# Altium PCB motherboard.PcbDoc (part 1 of 2)
Units mm, origin at the board's own origin, x right, y up, seen from the top; angles counter-clockwise.
Board outline 30 x 30 mm, 4 copper layers (Top Layer, Layer 1, Layer 2, Bottom Layer), stack 0.603 mm thick; 93 components, 78 nets, 485 pads, 216 vias.
Unrouted connection lines stored in the file: 1.
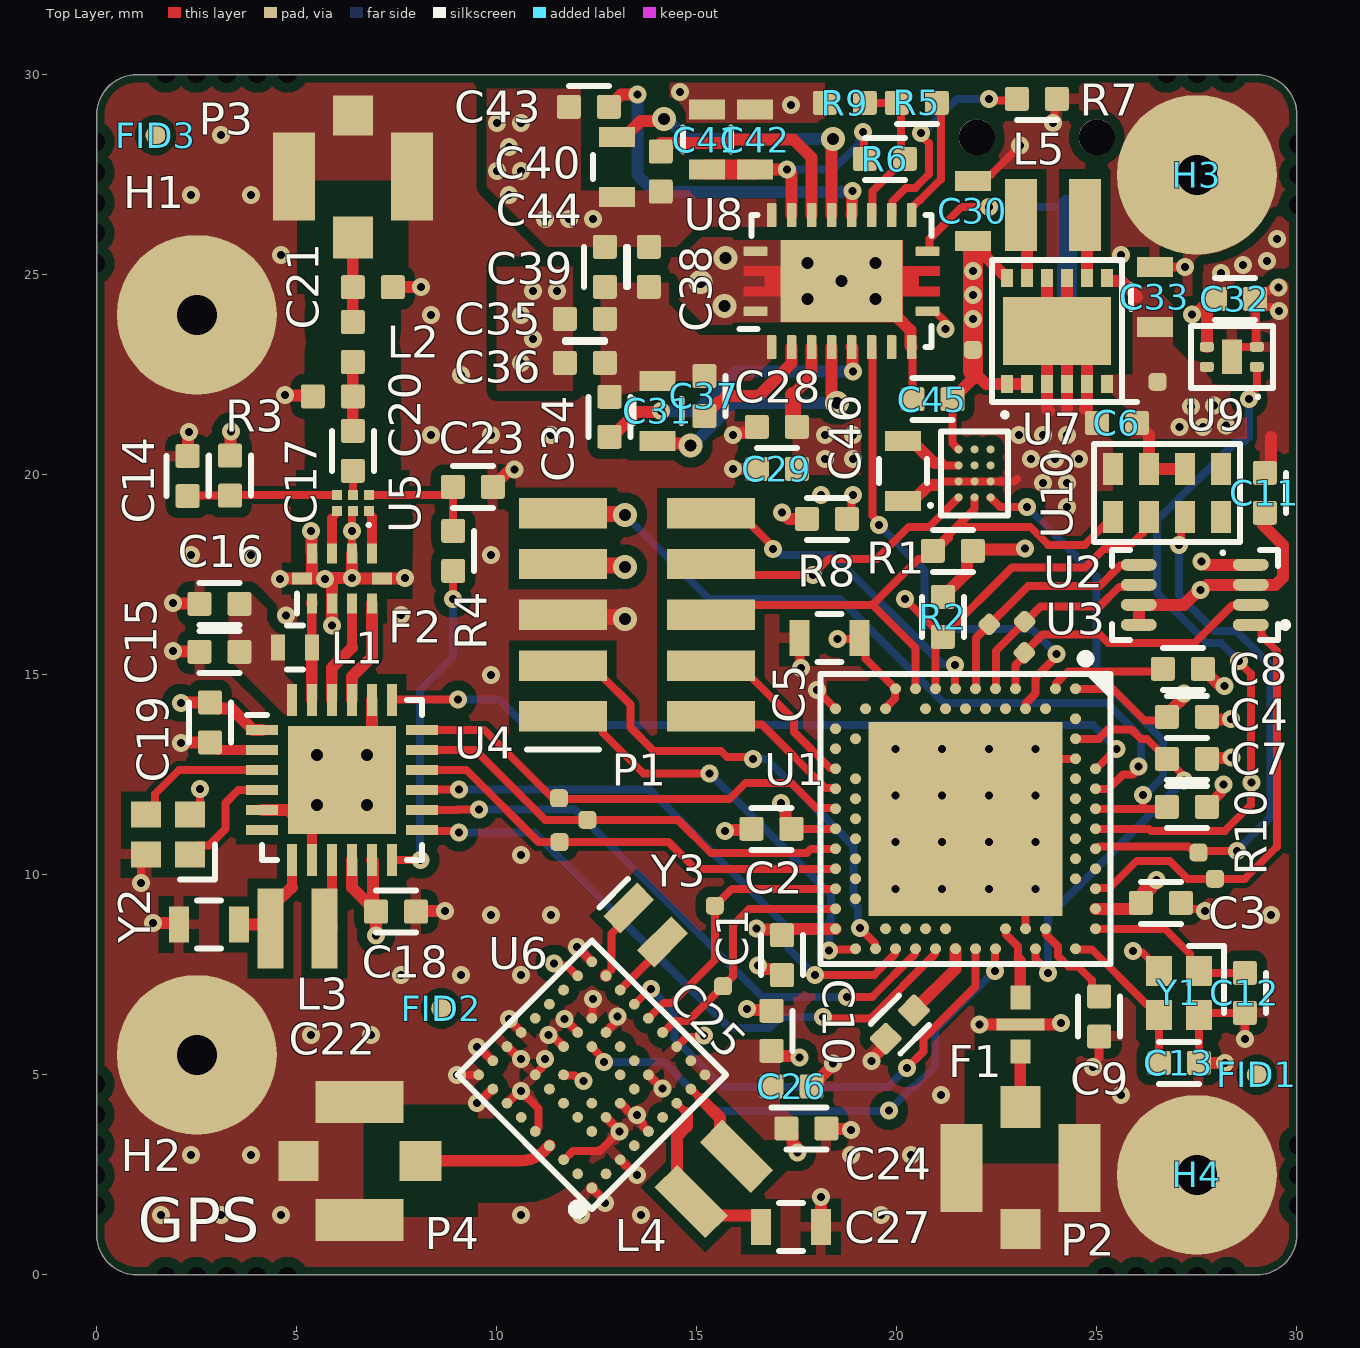
[diagram p0: Top Layer view]
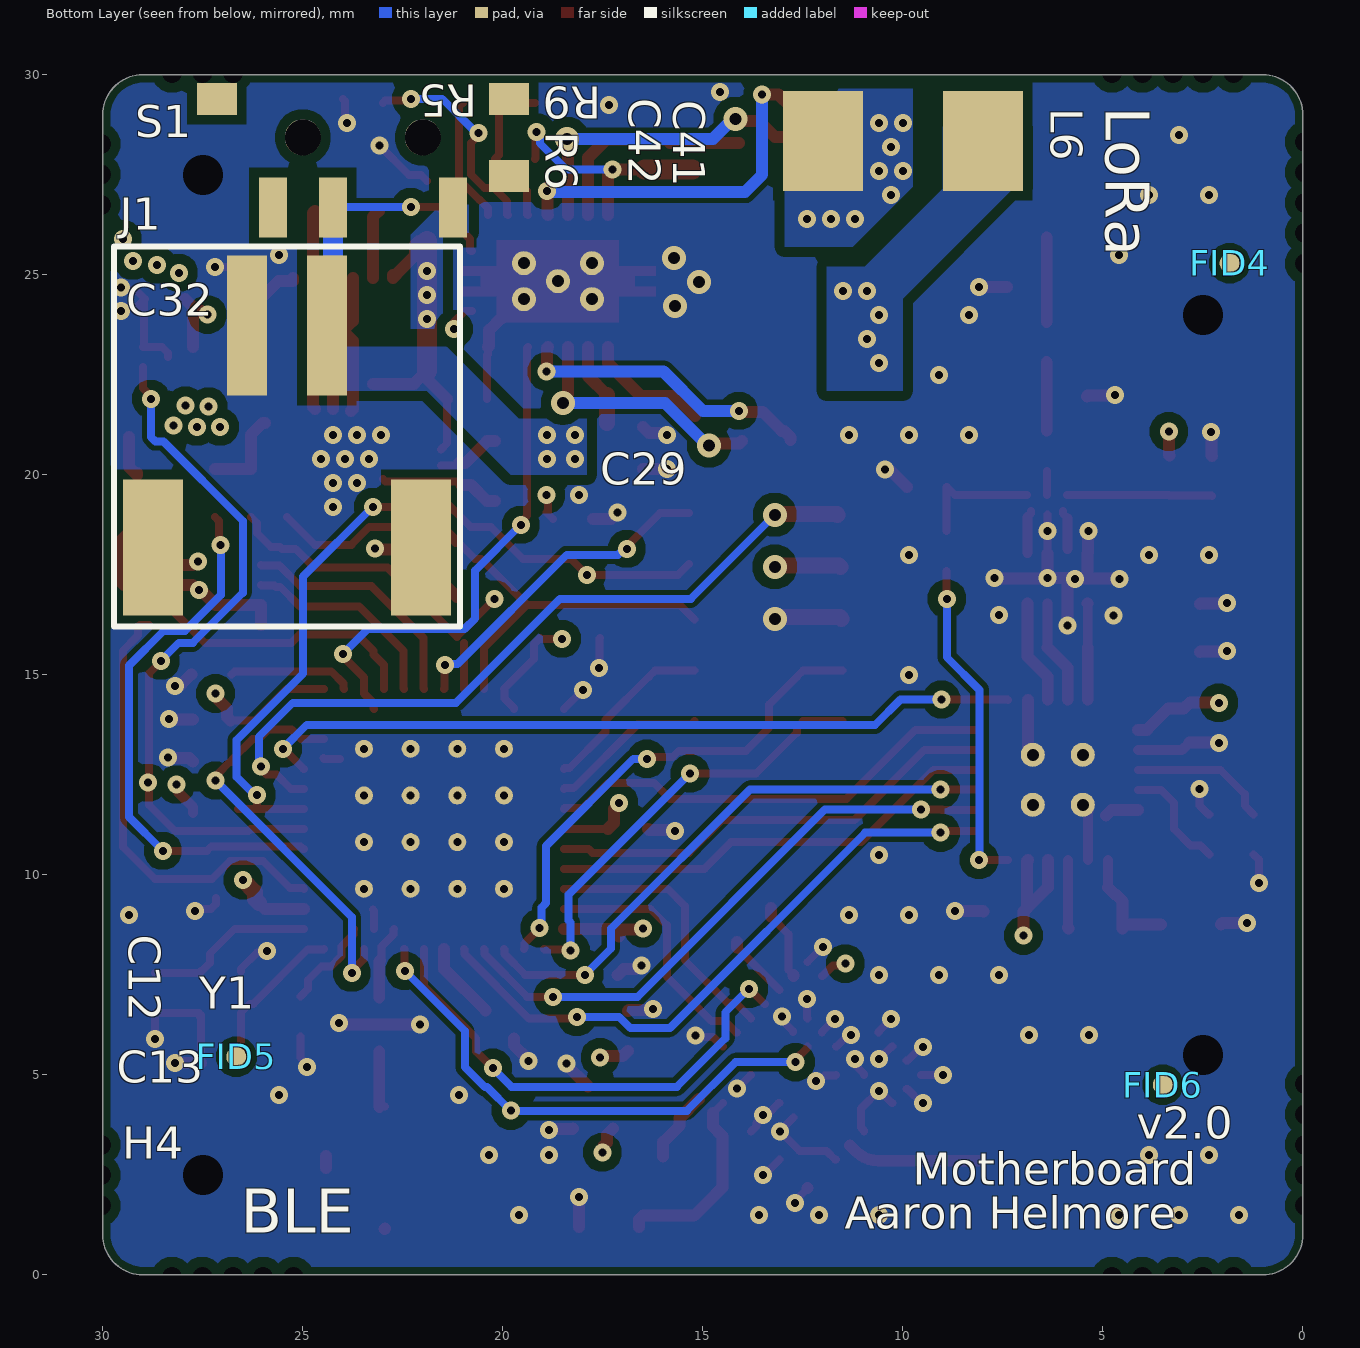
[diagram p1: Bottom Layer view, seen from below]
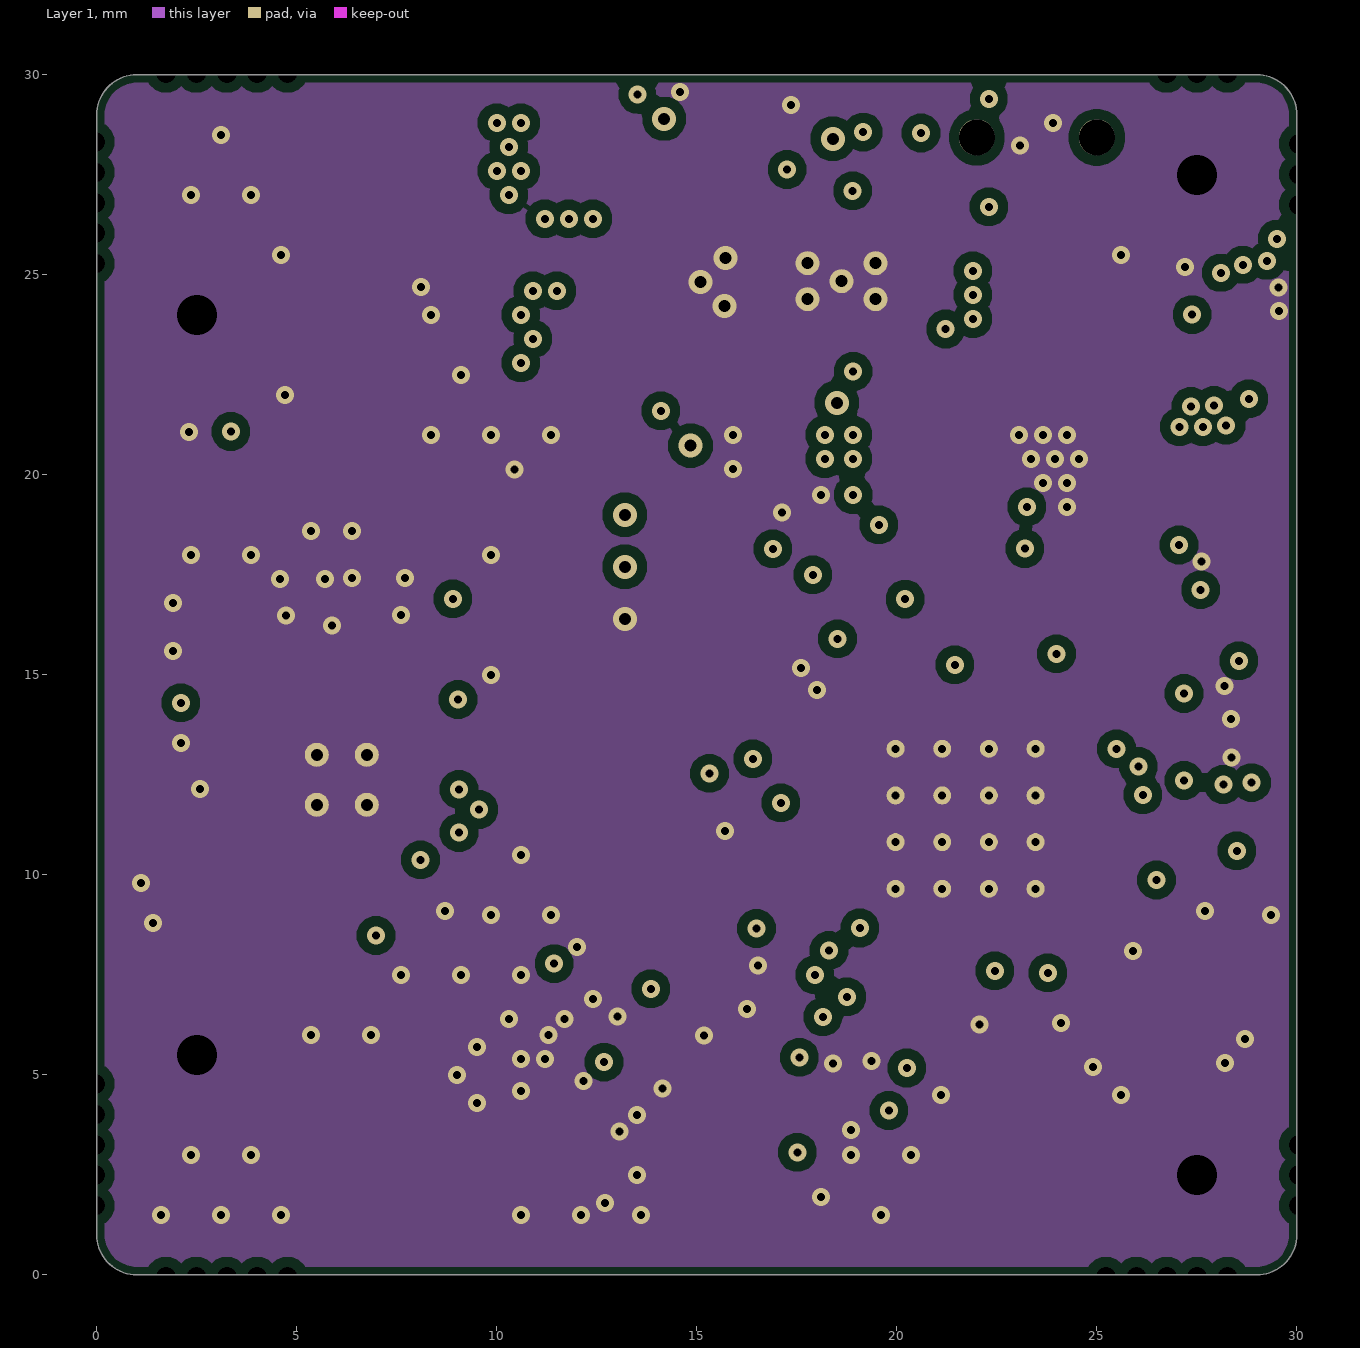
[diagram p2: Layer 1]
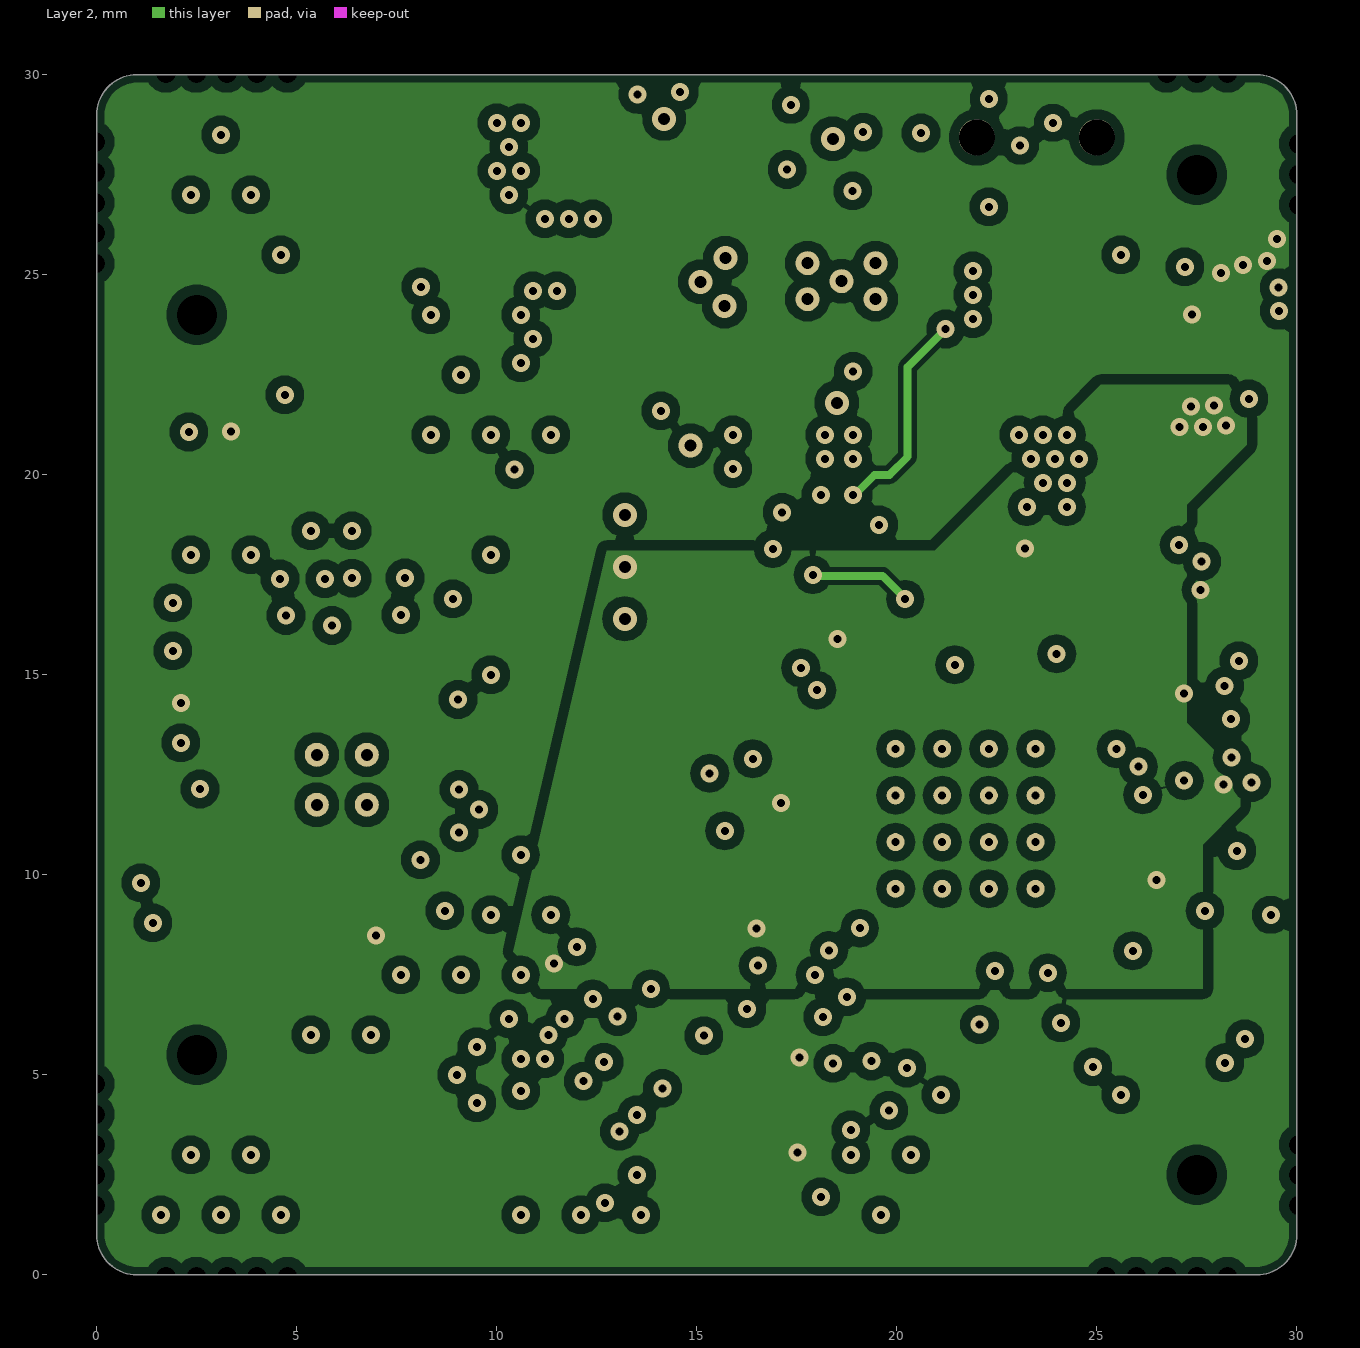
[diagram p3: Layer 2]

## Layer stack, top to bottom
Top Solder: solder mask 0.0102, Solder Resist, Dk 3.5
Top Layer: signal copper 0.0356
Dielectric 2: prepreg 0.0711, PP-006, Dk 4.1
Layer 1: signal copper 0.035
Dielectric 1: dielectric 0.32, FR-4, Dk 4.8
Layer 2: signal copper 0.035
Dielectric 3: prepreg 0.0711, PP-006, Dk 4.1
Bottom Layer: signal copper 0.0356
Bottom Solder: solder mask 0.0102, Solder Resist, Dk 3.5

## Board outline
0,1 0,29 cw(c1,29) 1,30 29,30 cw(c29,29) 30,29 30,1 cw(c29,1) 29,0 1,0 cw(c1,1)

## Design rules (kind name [scope] priority, off if disabled: settings)
BoardOutlineClearance Board_MouseBite_Clearance [IsFree and IsThruPin] p1: gap=0 ignorepadtopadclearanceinfootprint=FALSE
BoardOutlineClearance [All] p2: gap=0.2 ignorepadtopadclearanceinfootprint=FALSE
Clearance ClearanceRFLines [InNetClass('NRF_RF_LINES') or InNetClass('SX_RF_LINES') or InNetClass('ZOE_RF_LINES') vs InPolygon] p1: gap=0.9 ignorepadtopadclearanceinfootprint=TRUE
Clearance ClearanceNRF52 [InComponent('U1') and IsThruPin vs IsTrack] p2: gap=0.254 ignorepadtopadclearanceinfootprint=TRUE except(0: Arc-Hole Track-Hole SMDPad-Hole THPad-Hole Via-Hole Fill-Hole Poly-Hole Region-Hole Text-Hole; 0.1: Arc-Arc Arc-Track Track-Track; 0.127: Arc-Fill Arc-Poly Arc-Region Track-Fill Track-Poly Track-Region SMDPad-SMDPad; 0.15: Arc-Text Track-Text SMDPad-Text THPad-Text Via-Text Fill-Text Poly-Text Region-Text Text-Text; 0.154: Arc-THPad Arc-Via Track-THPad Track-Via SMDPad-Via; 0.2: Arc-SMDPad Track-SMDPad; 0.5: THPad-THPad)
Clearance [InComponent('U5') vs IsTrack] p3: gap=0.254 ignorepadtopadclearanceinfootprint=FALSE except(0: Arc-Hole Track-Hole SMDPad-Hole THPad-Hole Via-Hole Fill-Fill Fill-Poly Fill-Region Fill-Hole Poly-Poly Poly-Region Poly-Hole Region-Region Region-Hole Text-Hole; 0.1: Arc-Arc Arc-Track Arc-SMDPad Track-Track Track-SMDPad; 0.127: Arc-Fill Arc-Poly Arc-Region Track-Fill Track-Poly Track-Region SMDPad-SMDPad; 0.15: Arc-Text Track-Text SMDPad-Text THPad-Text Via-Text Fill-Text Poly-Text Region-Text Text-Text; 0.33: Arc-THPad Track-THPad; 0.5: THPad-THPad)
Clearance ClearanceViaToViaSameNet [IsVia vs IsVia] p4: gap=0.254 ignorepadtopadclearanceinfootprint=FALSE except(0.06: Via-Via)
Clearance ClearanceViaToPadSameNet [IsVia vs IsPad] p5: gap=0.075 ignorepadtopadclearanceinfootprint=TRUE
Clearance ClearanceDifferentNet [All] p6: gap=0.254 ignorepadtopadclearanceinfootprint=TRUE except(0: Arc-Hole Track-Hole SMDPad-Hole THPad-Hole Via-Hole Fill-Hole Poly-Hole Region-Hole Text-Hole; 0.1: Arc-Arc Arc-Track Track-Track; 0.127: Arc-Fill Arc-Poly Arc-Region Track-Fill Track-Poly Track-Region SMDPad-SMDPad; 0.15: Arc-Text Track-Text SMDPad-Text THPad-Text Via-Text Fill-Text Poly-Text Region-Text Text-Text; 0.154: Arc-Via Track-Via SMDPad-Via; 0.2: Arc-SMDPad Track-SMDPad; 0.33: Arc-THPad Track-THPad; 0.5: THPad-THPad)
HoleSize [All] p1: absolutevalues=TRUE maxlimit=6.3 minlimit=0.2 maxpercent=80.000 minpercent=20.000
MaxMinImpedance "Schematic Impedance Constraint_2" [InNetClass('ZOE_RF_LINES')] p1: minimum=49.50 maximum=50.50
MaxMinImpedance "Schematic Impedance Constraint_1" [InNetClass('SX_RF_LINES')] p2: minimum=49.50 maximum=50.50
MaxMinImpedance "Schematic Impedance Constraint" [InNetClass('NRF_RF_LINES')] p3: minimum=49.50 maximum=50.50
MinimumAnnularRing [All] p1: minimumring=0.1
MinimumSolderMaskSliver [All] p1: minsoldermaskwidth=0.05
PasteMaskExpansion [All] p1: expansion=0 percent=-10.000000
PlaneClearance [All] p1: clearance=0.3
PlaneConnect [All] p1: planeconnectstyle=Direct reliefexpansion=0.508 reliefentries=4 reliefconductorwidth=0.254 reliefairgap=0.254
PolygonConnect TopFloodSpedific [InComponentClass('largeItems') vs IsNamedPolygon('GND_TOP_FLOOD')] p1: connectstyle=Direct reliefconductorwidth=0.254 reliefentries=4 polygonreliefangle="90 Angle" airgapwidth=0.254
PolygonConnect TopFlood [All vs IsNamedPolygon('GND_TOP_FLOOD')] p2: thpad.connectstyle=Relief thpad.reliefconductorwidth=0.254 thpad.reliefentries=4 thpad.polygonreliefangle="90 Angle" thpad.airgapwidth=0.254 smdpad.connectstyle=Relief smdpad.reliefconductorwidth=0.254 smdpad.reliefentries=4 smdpad.polygonreliefangle="90 Angle" smdpad.airgapwidth=0.254 via.connectstyle=Direct via.reliefconductorwidth=0.254 via.reliefentries=4 via.polygonreliefangle="90 Angle" via.airgapwidth=0.254
PolygonConnect [All] p3: connectstyle=Direct reliefconductorwidth=0.254 reliefentries=4 polygonreliefangle="90 Angle" airgapwidth=0.254
RoutingLayers [All] p1: top layer_v5=TRUE mid layer 1_v5=FALSE mid layer 2_v5=TRUE bottom layer_v5=TRUE
RoutingVias [All] p1: holewidth=0.3 width=0.6 viastyle="Through Hole" minholewidth=0.2 minwidth=0.45 maxholewidth=0.711 maxwidth=1.27
SMDToPlane [All] p1: distance=100000
SilkToSilkClearance [All] p1: silktosilkclearance=0.15
SilkToSolderMaskClearance [IsPad] p1: minsilkscreentomaskgap=0.15 clearancetoexposedcopper=TRUE
SolderMaskExpansion [All] p1: expansion=0.05 istentingtop=TRUE
UnRoutedNet [All] p1: checkbadconnections=TRUE
Width [All] p1: maxlimit=0.6 minlimit=0.15 preferedwidth=0.2 minimp=50.000000 maximp=50.000000 favimp=50.000000
21 further rules are at their usual default settings.

## Classes and differential pairs
component class largeItems: H1 H2 H3 H4 P1 P2 P3 P4
net class ZOE_RF_LINES: G_ANT
net class SX_RF_LINES: L_ANT NetC17_1 NetC17_2 NetF2_6 NetF2_8
net class NRF_RF_LINES: ANT NetF1_1
component class motherboard: FID1 FID2 FID3 FID4 FID5 FID6 H1 H2 H3 H4
component class power: C28 C29 C30 C31 C32 C33 C34 C35 C36 C37 C38 C39 C40 C41 C42 C43 C44 C45 C46 J1 L5 L6 R5 R6 R7 R8 R9 R10 S1 U7 U8 U9 U10
component class mcu: C1 C2 C3 C4 C5 C6 C7 C8 C9 C10 C11 C12 C13 F1 P1 P2 R1 R2 U1 U2 U3 Y1
component class lora: C14 C15 C16 C17 C18 C19 C20 C21 C22 C23 F2 L1 L2 L3 P3 R3 R4 U4 U5 Y2
component class gps: C24 C25 C26 C27 L4 P4 U6 Y3

## Components (designator, comment, footprint, x,y, rotation, side; value= is the part's Value field where it differs from the comment)
C1 "100nF" CAP_0402 17.13,7.49 r90 top
C2 "100nF" CAP_0402 16.37,11.15 r0 top
C3 "100nF" CAP_0402 27.1,9.3 r180 top
C4 "1uF" CAP_0402 27.75,13.95 r180 top
C5 "4.7uF" CAP_0603 18.32,15.92 r0 top
C6 "100nF" CAP_0402 25,21.3 r0 top
C7 "1uF" CAP_0402 27.75,12.9 r180 top
C8 "100nF" CAP_0402 27.65,15.15 r180 top
C9 "100pF" CAP_0402 25.06,5.96 r90 top
C10 "820pF" CAP_0402 19.723,5.903 r45 top
C11 "100nF" CAP_0402 29.2,20.05 r270 top
C12 "16pF" CAP_0402 28.7,6.55 r90 top
C13 "16pF" CAP_0402 27.55,5.3 r180 top
C14 "1nF" CAP_0402 2.27,20.47 r270 top
C15 "47nF" CAP_0402 2.565,15.575 r0 top
C16 "47pF" CAP_0402 2.565,16.775 r0 top
C17 "39pF" CAP_0402 6.4,20.1 r90 top
C18 "100nF" CAP_0402 7.98,9.08 r180 top
C19 "1uF" CAP_0402 2.83,14.31 r270 top
C20 "Capacitor" CAP_0402 5.4,21.96 r0 top
C21 "Capacitor" CAP_0402 7.4,24.69 r180 top
C22 "470nF" CAP_0603 2.8,8.76 r0 top
C23 "1nF" CAP_0402 9.9,19.7 r180 top
C24 "1uF" CAP_0402 18.24,3.66 r180 top
C25 "100nF" CAP_0402 16.87,6.6 r270 top
C26 "100nF" CAP_0402 17.87,4.71 r180 top
C27 "4.7uF" CAP_0603 17.35,1.2 r180 top
C28 "1uF" CAP_0402 16.5,21.2 r0 top
C29 "100nF" CAP_0402 16.5,20.15 r0 top
C30 "10uF" CAP_0603 21.9,26.6 r270 top
C31 "470nF" CAP_0603 14.02,21.6 r90 top
C32 "1uF" CAP_0402 28.95,24.4 r180 top
C33 "22uF" CAP_0603 26.45,24.45 r270 top
C34 "47nF" CAP_0402 12.82,20.95 r90 top
C35 "220nF" CAP_0402 12.7,23.9 r180 top
C36 "10nF" CAP_0402 12.7,22.8 r180 top
C37 "10nF" CAP_0402 15.19,22.47 r270 top
C38 "2.2nF" CAP_0402 13.8,25.7 r270 top
C39 "120pF" CAP_0402 12.7,25.7 r270 top
C40 "10nF" CAP_0402 14.1,28.08 r270 top
C41 "10uF" CAP_0603 15.26,28.38 r270 top
C42 "10uF" CAP_0603 16.46,28.38 r270 top
C43 "47nF" CAP_0402 12.8,29.2 r180 top
C44 "470nF" CAP_0603 13,27.7 r270 top
C45 "1uF" CAP_0402 20.39,21.89 r0 top
C46 "2.2uF" CAP_0603 20.15,20.1 r90 top
F1 "2450FM07B0037" 2450FM07B0037 23.09,6.255 r270 top
F2 "0900FM15D0039E" 0900FM15D0039E 6.13,17.41 r90 top
FID1 "Fiducial" FIDUCIAL_0.5MM_SOLDER_1MM_MASK#1 29,5 r90 top locked
FID2 "Fiducial" FIDUCIAL_0.5MM_SOLDER_1MM_MASK#1 8.61,6.66 r90 top
FID3 "Fiducial" FIDUCIAL_0.5MM_SOLDER_1MM_MASK#1 1.47,28.49 r90 top
FID4 "Fiducial" FIDUCIAL_0.5MM_SOLDER_1MM_MASK#1 1.83,25.29 r90 bottom
FID5 "Fiducial" FIDUCIAL_0.5MM_SOLDER_1MM_MASK#1 26.66,5.45 r90 bottom
FID6 "Fiducial" FIDUCIAL_0.5MM_SOLDER_1MM_MASK#2 3.24,4.24 r90 bottom
H1 "M1.2 6mm Standoff" M1.2_6mm_STANDOFF 2.5,24 r0 top
H2 "M1.2 6mm Standoff" M1.2_6mm_STANDOFF 2.5,5.5 r0 top
H3 "M1.2 6mm Standoff" M1.2_6mm_STANDOFF 27.5,27.5 r0 top
H4 "M1.2 6mm Standoff" M1.2_6mm_STANDOFF 27.5,2.5 r0 top
J1 "JST_PH_2" "JST PH2 SMT" 25.4,20.96 r180 bottom
L1 "47nH" LQW15AN 4.95,15.68 r0 top
L2 "Inductor" RES_0402 6.4,22.82 r90 top
L3 "15uH" VLS2010ET-150M 5.02,8.66 r0 top
L4 "2.2uH" LQM2MPNxxxx 15.426,2.396 r225 top
L5 "2.2uH" LQM2MPNxxxx 23.9,26.5 r0 top
L6 "WR202010-18M8-ID" WR202010 12,28.35 r180 bottom
P1 "Off-Board Header" 1_27-5x2-MALE-HEADER 13.5,16.5 r90 top
P2 "CONMHF1-SMD-T" CONMHF1-SMD-T 23.09,2.67 r0 top
P3 "CONMHF1-SMD-T" CONMHF1-SMD-T 6.4,27.46 r180 top
P4 "CONMHF1-SMD-T" CONMHF1-SMD-T 6.57,2.85 r270 top
R1 "4k7" RES_0402 21.9,18.1 r180 top
R2 "4k7" RES_0402 21.15,16.95 r270 top
R3 "100" RES_0402 3.33,20.48 r270 top
R4 "100" RES_0402 8.91,17.6 r90 top
R5 "100" RES_0402 21,29.3 r180 top
R6 "42.2k" RES_0402 20.2,27.9 r180 top
R7 "10k" RES_0402 23,29.4 r0 top
R8 "2.4k" RES_0402 18.75,18.9 r180 top
R9 "200" RES_0402 19.2,29.3 r180 top
R10 "64K" RES_0402 27.75,11.7 r180 top
S1 "PCM12SMTR" PCM12SMTR 23.5,28.435 r0 bottom locked
U1 "nRF52833-QIAA" nRF52833-QIAA 21.72,11.4 r270 top
U2 "RV-3028-C7" RV-3028-C7 26.75,19.55 r0 top
U3 "MX25V8035F" MX25V8035F 27.45,17 r180 top
U4 "SX1262IMLTRT" SX1262IMLTRT 6.125,12.375 r0 top
U5 "BGS12SN6E6327XTSA1" BGS12SN6E6327XTSA1 6.4,19.3 r180 top
U6 "ZOE-M8Q" ZOE-M8Q 12.377,4.997 r135 top
U7 "RP604K331A" UDFN-12 24,23.6 r0 top
U8 "BQ51050b" BQ51050b-VQFN 18.62,24.84 r90 top
U9 "MIC94300YMT" MIC94300YMT 28.375,22.95 r270 top
U10 "LC709204F" LC709204F 21.945,20.035 r90 top
Y1 "32MHz" 4-SMD 27.55,7.6 r270 top
Y2 "32MHz" 4-SMD 2.33,10.51 r180 top
Y3 "32.768kHz" 2-SMD 13.721,8.745 r315 top

## Footprints (in the part's own frame and the unit in brackets; to place one, negate y for a bottom-side part, rotate by r counter-clockwise, add the part's x,y. Pads: shape width x height; smd on the part's side, far side on the other; paste and mask are expansions set on the pad)
1_27-5x2-MALE-HEADER [mm] "1.27mm pitch 5x2 row SMD male header"
  rect 0.76x2.2 smd mask+0: 1(-2.54,1.85) 2(-2.54,-1.85) 3(-1.27,1.85) 4(-1.27,-1.85) 5(0,1.85) 6(0,-1.85) 7(1.27,1.85) 8(1.27,-1.85) 9(2.54,1.85) 10(2.54,-1.85)
  silkscreen extent -3.37,0.95 -3.37,2.75, body extent -3.17,-2.55 3.17,2.55, height 5.1
2-SMD [mm]
  rect 0.6x1.2 smd mask+0.05: 1(-0.6,0) 2(0.6,0)
  silkscreen extent -1.12,-0.5 -1.12,0.5, body extent -0.8,-0.5 0.8,0.5, height 0.5
4-SMD [mm]
  rect 0.75x0.65 smd paste-0.037 mask+0.05: 1(0,0) 2(1.1,0) 3(1.1,-1) 4(0,-1)
  silkscreen extent -0.63,-0.25 0.25,0.63, body extent -0.45,-1.3 1.55,0.3, height 0.5
0900FM15D0039E [mm] "Miniature impedance-matched filter for Semtech SX1261/SX1262"
  rect 0.5x0.25 smd paste-0.022 mask+0.05: 1(-0.625,0.75) 2(-0.625,0.25) 3(-0.625,-0.25) 4(-0.625,-0.75) 6(0.625,-0.75) 7(0.625,-0.25) 8(0.625,0.25) 9(0.625,0.75)
  rect 0.3x0.5 smd paste-0.025 mask+0.05: 5(0,-1) 10(0,1)
  silkscreen extent -0.87,1.12 -0.38,1.12, body extent -0.63,-1 0.63,1, height 0.8
2450FM07B0037 [mm] "nRF52 Bluetooth matching filter"
  rect 0.6x0.5 smd paste-0.029 mask+0.05: 1(-0.675,0) 3(0.675,0)
  rect 0.3x1.2 smd paste-0.045 mask+0.05: 2(0,0)
  body extent -0.5,-0.25 0.5,0.25, height 0.4
BGS12SN6E6327XTSA1 [mm] "SPDT RF switch"
  rect 0.25x0.25 smd paste-0.024 mask+0.05: 1(-0.4,0.2) 2(0,0.2) 3(0.4,0.2) 4(0.4,-0.2) 5(0,-0.2) 6(-0.4,-0.2)
  silkscreen extent -0.4,0.55 -0.4,0.55, body extent -0.55,-0.35 0.55,0.35, height 0.38
BQ51050b-VQFN [mm] "Wireless charging receiver and Li-Ion/Li-Poly battery charger"
  round 0.6 hole 0.3 paste-0.015 mask+0.05: 0(-0.45,0.85) 0(-0.45,-0.85) 0(0,0) 0(0.45,0.85) 0(0.45,-0.85)
  rect 2.05x3.05 smd paste-2539.97 mask+0: 0(0,0)
  rrect25% 0.24x0.6 smd paste-0.009 mask+0.05: 1(-0.75,2.15) 10(-0.75,-2.15) 11(0.75,-2.15) 20(0.75,2.15)
  rrect25% 0.6x0.24 smd paste-0.009 mask+0.05: 2(-1.65,1.75) 3(-1.65,1.25) 4(-1.65,0.75) 5(-1.65,0.25) 6(-1.65,-0.25) 7(-1.65,-0.75) 8(-1.65,-1.25) 9(-1.65,-1.75) 12(1.65,-1.75) 13(1.65,-1.25) 14(1.65,-0.75) 15(1.65,-0.25) 16(1.65,0.25) 17(1.65,0.75) 18(1.65,1.25) 19(1.65,1.75)
  Top Layer region: -0.375,2.45 -0.135,2.45 -0.135,1.925 0.135,1.925 0.135,2.45 0.375,2.45 0.375,1.525 1.025,1.525 1.025,-1.525 0.375,-1.525 0.375,-2.45 0.135,-2.45 0.135,-1.925 -0.135,-1.925 -0.135,-2.45 -0.375,-2.45 -0.375,-1.525 -1.025,-1.525 -1.025,1.525 -0.375,1.525
  silkscreen extent -1.65,-2.25 1.65,2.55, body extent -1.65,-2.25 1.65,2.25, height 1
CAP_0402 [mm]
  rrect20% 0.6x0.6 smd mask+0.05: 1(0,0) 2(1,0)
  silkscreen extent 0,-0.53 1,0.53, body extent 0,-0.25 1,0.25, height 0.6
CAP_0603 [mm]
  rect 0.5x0.9 smd mask+0: 1(-0.75,0) 2(0.75,0)
  silkscreen extent -0.3,-0.6 0.3,0.6, body extent -0.8,-0.4 0.8,0.4, height 0.9
CONMHF1-SMD-T [mm]
  rect 1x1.05 smd mask+0: 1(0,1.525)
  rect 1.05x2.2 smd mask+0: 2(-1.475,0) 3(1.475,0)
  rect 1x1 smd mask+0: 4(0,-1.525)
  body extent -1.5,-1.55 1.5,1.55, height 1.25
FIDUCIAL_0.5MM_SOLDER_1MM_MASK#1 [mm]
  round 0.5 smd mask+0.25: 1(0,0)
FIDUCIAL_0.5MM_SOLDER_1MM_MASK#2 [mm]
  round 0.5 smd mask+0.25: 1(0.51,0.26)
"JST PH2 SMT" [mm] "JST PH 2pin connector SMT"
  rect 1x3.5 smd paste-0.04 mask+0.05: 1(1,2.775) 2(-1,2.775)
  rect 1.5x3.4 smd paste-0.053 mask+0.05: SHIELD(3.35,-2.775) SHIELD1(-3.35,-2.775)
  silkscreen extent -4.33,-4.75 4.33,4.75
LC709204F [mm] "on-semi I2C Li-Ion/Li-Pol fuel gauge IC"
  round 0.2 smd paste-2539.97 mask+0.05: A1(-0.6,0.4) A2(-0.2,0.4) A3(0.2,0.4) A4(0.6,0.4) B1(-0.6,0) B2(-0.2,0) B3(0.2,0) B4(0.6,0) C1(-0.6,-0.4) C2(-0.2,-0.4) C3(0.2,-0.4) C4(0.6,-0.4)
  silkscreen extent -1.05,-0.84 1.05,1.11, body extent -0.96,-0.74 0.96,0.74, height 0.51
LQM2MPNxxxx [mm] "Inductor in 0805"
  rect 0.8x1.8 smd mask+0: 1(-0.8,0) 2(0.8,0)
  body extent -1,-0.8 1,0.8, height 0.9
LQW15AN [mm]
  rect 0.35x0.65 smd mask+0.05: 1(-0.425,0) 2(0.425,0)
  silkscreen extent -0.2,-0.55 0.2,0.55
M1.2_6mm_STANDOFF [mm]
  round 4 / inner round 0 / far side round 0 hole 1 mask+0: 1(0,0)
  body extent -1.65,-1.65 1.65,1.65, height 6
MIC94300YMT [mm] "200mA load switch"
  rrect50% 0.25x0.35 smd paste-0.008 mask+0.05: 1(0.25,0.625) 2(-0.25,0.625) 3(-0.25,-0.625) 4(0.25,-0.625)
  rect 0.86x0.5 smd paste-0.033 mask+0.05: EP1(0,0)
  silkscreen extent -0.77,-1.03 1.01,1.03, body extent -0.6,-0.8 0.6,0.8, height 0.55
MX25V8035F [mm]
  rrect100% 0.9x0.3 smd mask+0: 1(-1.4,0.75) 2(-1.4,0.25) 3(-1.4,-0.25) 4(-1.4,-0.75) 5(1.4,-0.75) 6(1.4,-0.25) 7(1.4,0.25) 8(1.4,0.75)
  silkscreen extent -2.28,-1.12 2.07,1.12, body extent -1.5,-1 1.5,1, height 0.55
nRF52833-QIAA [mm] "aQFN-73 Footprint for nRF52833"
  round 0.275 smd paste-2539.97 mask+0.05: A8(-1.25,3.25) A10(-0.75,3.25) A12(-0.25,3.25) A14(0.25,3.25) A16(0.75,3.25) A18(1.25,3.25) A20(1.75,3.25) A22(2.25,3.25) A23(2.75,3.25) AA24(3.25,-2.25) AB2(-2.75,-2.5) AC5(-2,-2.75) AC9(-1,-2.75) AC11(-0.5,-2.75) AC13(0,-2.75) AC15(0.5,-2.75) AC17(1,-2.75) AC19(1.5,-2.75) AC21(2,-2.75) AC24(3.25,-2.75) AD2(-2.75,-3.25) AD4(-2.25,-3.25) AD6(-1.75,-3.25) AD8(-1.25,-3.25) AD10(-0.75,-3.25) AD12(-0.25,-3.25) AD14(0.25,-3.25) AD16(0.75,-3.25) AD18(1.25,-3.25) AD20(1.75,-3.25) AD22(2.25,-3.25) AD23(2.75,-3.25) B1(-3.25,2.75) B3(-2.5,2.75) B5(-2,2.75) B7(-1.5,2.75) B9(-1,2.75) B11(-0.5,2.75) B13(0,2.75) B15(0.5,2.75) B17(1,2.75) B19(1.5,2.75) B24(3.25,2.75) C1(-3.25,2.25) D2(-2.75,2) D23(2.75,2) E24(3.25,1.75) F2(-2.75,1.5) F23(2.75,1.5) G1(-3.25,1.25) H2(-2.75,1) H23(2.75,1) J1(-3.25,0.75) J24(3.25,0.75) K2(-2.75,0.5) L1(-3.25,0.25) L24(3.25,0.25) M2(-2.75,0) N1(-3.25,-0.25) N24(3.25,-0.25) P2(-2.75,-0.5) P23(2.75,-0.5) R1(-3.25,-0.75) R24(3.25,-0.75) T2(-2.75,-1) T23(2.75,-1) U1(-3.25,-1.25) U24(3.25,-1.25) V23(2.75,-1.5) W1(-3.25,-1.75) W24(3.25,-1.75) Y2(-2.75,-2) Y23(2.75,-2)
  round 0.45 hole 0.2 paste-0.012 mask+0.05: DP1(-1.75,1.75) DP1(-1.75,-0.583) DP1(-1.75,0.583) DP1(-1.75,-1.75) DP1(-0.583,1.75) DP1(-0.583,0.583) DP1(-0.583,-0.583) DP1(-0.583,-1.75) DP1(0.583,1.75) DP1(0.583,0.583) DP1(0.583,-0.583) DP1(0.583,-1.75) DP1(1.75,1.75) DP1(1.75,-0.583) DP1(1.75,0.583) DP1(1.75,-1.75)
  rect 4.85x4.85 smd paste-2539.97 mask+0.05: DP1(0,0)
  silkscreen extent -4.1,-3.63 3.63,3.63, body extent -3.5,-3.5 3.5,3.5, height 0.67
PCM12SMTR [mm] "CK switches PCM series SMT switch"
  rect 0.7x1.5 smd paste-0.024 mask+0.05: 1(-2.25,1.75) 2(0.75,1.75) 3(2.25,1.75)
  rect 1x0.8 smd paste-0.023 mask+0.05: ""(-3.65,-0.965) ""(-3.65,0.965) ""(3.65,-0.965)
  round 0.9 hole 0.9 unplated paste-0.023 mask+0.05: ""(-1.5,0) ""(1.5,0)
  body extent -3.85,-2.8 3.85,2.2, height 1.4
RES_0402 [mm]
  rrect20% 0.6x0.6 smd mask+0.05: 1(0,0) 2(1,0)
  body extent 0,-0.25 1,0.25, height 0.35
RV-3028-C7 [mm] "Extreme Low Power RTC module"
  rect 0.5x0.8 smd paste-0.016 mask+0.05: 1(1.35,-0.6) 2(0.45,-0.6) 3(-0.45,-0.6) 4(-1.35,-0.6) 5(-1.35,0.6) 6(-0.45,0.6) 7(0.45,0.6) 8(1.35,0.6)
  silkscreen extent -1.83,-1.51 1.83,1.23, body extent -1.6,-0.75 1.6,0.75, height 0.8
SX1262IMLTRT [mm] "Semtech LoRa Transceiver"
  round 0.6 hole 0.3 paste-0.015 mask+0.05: 0(-0.625,-0.625) 0(-0.625,0.625) 0(0.625,-0.625) 0(0.625,0.625)
  rect 2.7x2.7 smd paste-2539.97 mask+0.05: 0(0,0)
  rect 0.8x0.25 smd paste-0.02 mask+0.05: 1(-2,1.25) 2(-2,0.75) 3(-2,0.25) 4(-2,-0.25) 5(-2,-0.75) 6(-2,-1.25) 13(2,-1.25) 14(2,-0.75) 15(2,-0.25) 16(2,0.25) 17(2,0.75) 18(2,1.25)
  rect 0.25x0.8 smd paste-0.02 mask+0.05: 7(-1.25,-2) 8(-0.75,-2) 9(-0.25,-2) 10(0.25,-2) 11(0.75,-2) 12(1.25,-2) 19(1.25,2) 20(0.75,2) 21(0.25,2) 22(-0.25,2) 23(-0.75,2) 24(-1.25,2)
  silkscreen extent -2.37,-2 2,2, body extent -2,-2 2,2, height 0.9
UDFN-12 [mm] "UDFN-12 package for RP604x"
  rect 0.3x0.45 smd paste-0.019 mask+0.05: 1(-1.25,-1.325) 2(-0.75,-1.325) 3(-0.25,-1.325) 4(0.25,-1.325) 5(0.75,-1.325) 6(1.25,-1.325) 7(1.25,1.325) 8(0.75,1.325) 9(0.25,1.325) 10(-0.25,1.325) 11(-0.75,1.325) 12(-1.25,1.325)
  rect 2.7x1.7 smd paste-2539.97 mask+0.05: 13(0,0)
  silkscreen extent -1.63,-2.14 1.63,1.78, body extent -1.5,-1.35 1.5,1.35, height 0.58
VLS2010ET-150M [mm] "Inductor"
  rect 0.65x2 smd mask+0.05: 1(-0.675,0) 2(0.675,0)
  body extent -1,-1 1,1, height 1
WR202010 [mm]
  rect 2x2.5 smd mask+0: 1(0,0) 2(4,0)
ZOE-M8Q [mm] "ublox GNSS receiver"
  round 0.27 smd paste-2539.97 mask+0.05: A1(-2,2) A2(-1.5,2) A3(-1,2) A4(-0.5,2) A5(0,2) A6(0.5,2) A7(1,2) A8(1.5,2) A9(2,2) B1(-2,1.5) B9(2,1.5) C1(-2,1) C3(-1,1) C4(-0.5,1) C5(0,1) C6(0.5,1) C7(1,1) C9(2,1) D1(-2,0.5) D3(-1,0.5) D4(-0.5,0.5) D6(0.5,0.5) D9(2,0.5) E1(-2,0) E3(-1,0) E7(1,0) E9(2,0) F1(-2,-0.5) F3(-1,-0.5) F4(-0.5,-0.5) F6(0.5,-0.5) F7(1,-0.5) F9(2,-0.5) G1(-2,-1) G3(-1,-1) G4(-0.5,-1) G5(0,-1) G6(0.5,-1) G7(1,-1) G9(2,-1) H1(-2,-1.5) H9(2,-1.5) J1(-2,-2) J2(-1.5,-2) J3(-1,-2) J4(-0.5,-2) J5(0,-2) J6(0.5,-2) J7(1,-2) J8(1.5,-2) J9(2,-2)
  silkscreen extent -2.37,-2.37 2.37,2.75, body extent -2.25,-2.25 2.25,2.25, height 0.9

## Part data
C1 C2 C3 C4 C6 C7 C8 C11 C18 C19 C24 C25 C26 C28 C29 C30 C32 C35 C41 C42 C45 C46: library part Capacitor, Dielectric=X5R, Voltage=25V
C5 C27: library part Capacitor, Dielectric=X5R, Voltage=6.3V
C9 C10 C12 C13 C16 C17: library part Capacitor, Dielectric=C0G, Voltage=50V
C14 C23 C38 C39: library part Capacitor, Dielectric=X7R, Voltage=50V
C15 C22 C31 C34 C36 C37 C40 C43 C44: library part Capacitor, Dielectric=X7R, Voltage=25V
C33: library part Capacitor, Dielectric=X5R, Voltage=10V
F1: "Miniature 2.4GHz impedance matched low pass filter optimized for nRF52xxx"
F2: "Miniature impedance-matched filter for Semtech SX1261/SX1262 for 915MHz operation"
J1: "JST PH series connector with 2 pins 1 row"
L1 L3 L4 L5 L6: library part Inductor
P1: library part CONN_1-27_5x2, "1.27mm pitch 5x2 pin male connector"
R1 R2 R3 R4 R5 R6 R7 R8 R10: library part R_Small, Tolerance=1%
  R1 R2 R6 R7 R8 R10: Wattage=1/10W
  R3 R4 R5: Wattage=1/4W
R9: library part R_Small, Tolerance=5%, Wattage=1/5W
S1: "CK Switches 300mA 6VDC SMT right-angle slide switch"
U1: "BLE 5.1, Cortex M-4 SoC"
U2: "Extreme Low Power RTC Module"
U4: "Semtech LoRa radio transceivers"
U6: "ublox GPS/GNSS receiver"
U7: "Nisshinbo Ultra-low quiescent current, 300mA, Buck-Boost DC/DC converter"
U8: "Single stage wireless power receiver and Li-Ion/Li-Pol battery charger. Qi compatible"
U9: "200mA load switch"
U10: "onsemi I2C Li-Ion/Li-Poly Fuel Gauge"
Y1 Y2: library part Crystal_2_2
Y3: library part Crystal_2_1

## Free pads (board coordinates)
  rrect50% 0.45x0.45 smd paste-2539.97 mask+0.05: 2(11.555,11.915) 2(11.57,10.82) 2(12.265,11.375) 2(15.45,9.225) 2(15.655,7.215) 2(21.9,23.125) 2(27.545,10.555) 2(27.955,9.9) ""(26.52,22.325)
  rrect50% 0.45x0.45 smd rot 45 paste-2539.97 mask+0.05: 2(22.31,16.26) 2(23.19,15.55) 2(23.195,16.33)
  round 0.2 hole 0.5 unplated paste+0 mask+0: MB(-0.05,1.73) MB(-0.05,2.49) MB(-0.05,3.25) MB(-0.05,4.01) MB(-0.05,4.77) MB(-0.05,25.28) MB(-0.05,26.04) MB(-0.05,26.8) MB(-0.05,27.56) MB(-0.05,28.32) MB(1.73,-0.05) MB(1.73,30.05) MB(2.49,-0.05) MB(2.49,30.05) MB(3.25,-0.05) MB(3.25,30.05) MB(4.01,-0.05) MB(4.01,30.05) MB(4.77,-0.05) MB(4.77,30.05) MB(25.23,-0.05) MB(25.99,-0.05) MB(26.75,-0.05) MB(26.75,30.05) MB(27.51,30.05) MB(27.51,-0.05) MB(28.27,-0.05) MB(28.27,30.05) MB(30.05,1.73) MB(30.05,2.49) MB(30.05,3.25) MB(30.05,26.75) MB(30.05,27.51) MB(30.05,28.27)

## Via types
v1: diameter 0.45, hole 0.2, Top Layer to Bottom Layer, tented both sides, 196 vias
v2: diameter 0.45, hole 0.2, Top Layer to Bottom Layer, tented bottom, 10 vias
v3: diameter 0.6, hole 0.3, Top Layer to Bottom Layer, tented both sides, 10 vias

## Nets (pads, with @x,y where several pads share a name; then routed paths per layer and width w, separated by ;. In a path a pad name is that pad's centre, name@x,y a point inside that pad or via, vN(x,y) a via of type N, cw(c..) or ccw(c..) an arc to the next point about the centre after c; other vN are vias at no path point)
3V3: C1.2 C2.2 C3.2 C4.2 C5.2 C6.2 C33.2 P1.7 pad. R1.1 R2.1 R10.1 U1.A22 U1.AD14 U1.AD23 U1.B1 U1.W1 U1.Y2 U2.6 U2.7 U6.H9 U7.6 U7.7 U9.4 | length 21.5
  Top Layer w0.2: v1(11.437,7.778) 11.485,7.73 11.747,7.73 12.005,7.472 U6.H9@12.024,7.472 ; C2.2@17.37,11.15 U1.AD14@18.47,11.15 ; v1(18.52,15.9) 19.05,15.9 C5.2@19.07,15.92 19.22,15.77 19.22,15.4 U1.W1@19.97,14.65 19.956,14.636 19.956,14.406 19.72,14.17 U1.Y2@19.72,14.15 ; U1.B1@24.47,14.65 25.4,14.65 26.199,13.851 C4.2@26.801,13.851
  Top Layer w0.25: R10.1@27.75,11.55 R10.1@27.75,11.7 28.124,12.074 28.124,12.218 v1(28.162,12.256)
  Top Layer w0.3: v1(16.496,8.658) 16.525,8.629 16.98,8.629 17.096,8.513 17.096,8.456 17.28,8.64 17.66,8.64 17.67,8.65 U1.AD23@18.47,8.65 ; v1(17.1,11.8) 17.1,11.759 17.22,11.639 17.22,11.3 C2.2@17.37,11.15 ; R2.1@21.15,16.95 21.75,17.55 21.75,17.95 21.93,18.13 23.171,18.13 v1(23.2,18.159) ; U1.A22@24.97,9.15 25.774,9.15 25.95,9.15 C3.2@26.1,9.3 ; U7.7@25.25,24.925 25.25,24.85 25.605,24.85 26.005,24.45 ; C6.2@25.95,21.3 C6.2@26,21.3 26.3,21 U2.6@26.3,20.15 U2.7@27.2,20.15 ; C4.2@26.801,13.851 26.9,13.95 26.9,14.16 27.155,14.415 27.155,14.505 v1(27.184,14.534)
  Top Layer w0.4: P1.7@11.56,17.7 11.595,17.735 13.165,17.735 v3(13.2,17.7) ; C3.2@26.1,9.3 26.2,9.4 26.2,9.567 26.491,9.857 v1(26.491,9.871)
  other v1: 27.07,21.199 27.65,21.2 28.228,21.236 27.352,21.705 27.93,21.733
3V3_SW: C11.2 C18.2 C19.1 C24.2 C25.2 C26.2 C32.2 R3.1 U3.3 U3.7 U3.8 U4.1 U4.10 U4.11 U6.J1 U6.J2 U9.3 | length 15.3
  Top Layer w0.3: v1(2.1,14.3) 2.105,14.305 2.825,14.305 2.97,14.16 3.365,14.16 3.9,13.625 U4.1@4.125,13.625 ; R3.1@3.33,20.48 3.34,20.49 3.34,21.07 v1(3.35,21.08) ; U4.10@6.375,10.375 6.375,9.685 C18.2@6.9,9.16 ; U4.11@6.875,10.375 6.9,10.35 C18.2@6.9,9.16 ; v1(6.98,8.48) C18.2@6.98,9.08 C18.2@6.9,9.16 ; C25.2@16.87,5.6 17.005,5.465 17.535,5.465 v1(17.564,5.436) ; C24.2@17.24,3.66 17.39,3.51 17.39,3.31 17.484,3.216 17.484,3.09 v1(17.513,3.061) ; U3.8@26.05,16.25 U3.7@26.05,16.75 27.182,16.75 27.557,17.125 v1(27.598,17.125) ; v1(27.386,24.002) 27.415,24.031 27.481,24.031 27.65,24.2 C32.2@27.75,24.2 ; v1@27.641,17.154 27.667,17.154 27.763,17.25 29.474,17.25 29.65,17.426 29.65,18.25 C11.2@29.15,18.75 ; U9.3@27.75,23.2 C32.2@27.75,24.2 ; C32.2@27.95,24.4 C32.2@27.75,24.2
  other v1: 28.1,25.05 28.65,25.25 29.5,25.9
  other v2: 29.25,25.35
AC1: C31.2 C34.2 C35.1 C36.1 C37.1 C38.2 C39.2 U8.2
AC2: C38.1 C39.1 C40.2 C43.2 C44.2 L6.1 U8.19
  other v1: 11.2,26.4 11.8,26.4 12.4,26.4 10.3,27 10,27.6 10.6,27.6 10.3,28.2 10,28.8 10.6,28.8
ALRM: R10.2 U1.A12 U10.C1 | length 11.9
  Top Layer w0.2: U10.C1@22.345,19.435 22.58,19.2 v2(23.25,19.2) ; U1.A12@24.97,11.65 26.15,11.65 ; v1@26.15,12 26.15,11.65 ; R10.2@26.62,11.65 26.15,11.65
  Bottom Layer w0.2: v2(23.25,19.2) 24.995,17.455 24.995,15.027 26.658,13.365 26.658,12.45 26.208,12 v1(26.15,12)
ANT: F1.3 P2.1 | length 1.4
  Top Layer w0.293: P2.1@23.09,4.195 F1.3@23.09,5.58
BOOT1: C37.2 U8.3 | length 3.1
  Top Layer w0.3: C37.2@15.19,21.47 15.54,21.82 15.6,21.82 15.75,21.97 16.55,21.97 17.37,22.79 U8.3@17.37,23.19
BOOT2: C40.1 U8.17 | length 5.4
  Top Layer w0.3: C40.1@14.1,28.296 15.815,28.296 15.899,28.38 17.42,28.38 17.87,27.93 U8.17@17.87,26.49
C\H\G\: U1.F2 U8.7 | length 12.7
  Top Layer w0.2: U8.7@19.37,23.19 19.39,23.17 19.39,18.978 19.55,18.818 v1(19.55,18.75) ; U1.F2@23.22,14.15 23.234,14.164 23.234,14.296 23.469,14.531 23.469,14.934 23.995,15.46 v1(23.995,15.525)
  Bottom Layer w0.2: v1(19.55,18.75) 20.69,17.61 20.69,16.41 20.954,16.146 23.374,16.146 v1(23.995,15.525)
CLAMP1: C31.1 U8.5 | length 6.4
  Top Layer w0.3: C31.1@14.02,20.85 14.086,20.784 14.788,20.784 v3(14.845,20.727) ; U8.5@18.37,23.19 18.37,22.011 18.5,21.881 v3(18.5,21.8)
  Bottom Layer w0.3: v3(14.845,20.727) 14.877,20.727 15.95,21.8 v3(18.5,21.8)
CLAMP2: C44.1 U8.16 | length 7.7
  Top Layer w0.3: C44.1@13,28.45 13.2,28.45 13.593,28.843 14.128,28.843 v3(14.185,28.9) ; U8.16@18.37,26.49 18.37,28.37 v3(18.4,28.4)
  Bottom Layer w0.3: v3(14.185,28.9) 14.246,28.9 14.746,28.4 v3(18.4,28.4)
COMM1: C34.1 U8.6 | length 7.5
  Top Layer w0.3: C34.1@12.803,20.873 12.803,20.933 12.97,21.1 13.03,21.1 13.501,21.571 14.071,21.571 v1(14.1,21.6) ; U8.6@18.87,23.19 18.89,23.169 18.89,22.603 v1(18.911,22.582)
  Bottom Layer w0.3: v1(14.1,21.6) 15,21.6 15.982,22.582 v1(18.911,22.582)
COMM2: C43.1 U8.15 | length 9.1
  Top Layer w0.3: C43.1@12.8,29.2 13.108,29.508 v1(13.513,29.508) ; U8.15@18.87,26.49 18.884,26.504 18.884,27.085 v1(18.899,27.1)
  Bottom Layer w0.3: v1(13.513,29.508) 13.513,27.501 13.949,27.065 18.765,27.065 18.771,27.071 18.87,27.071 v1(18.899,27.1)
DEBUG_UART_RX: P1.4 U1.AD8 | length 4.5
  Top Layer w0.2: P1.4@15.21,15.11 16.19,15.11 16.35,14.95 17.432,13.868 17.432,13.57 18.337,12.664 18.456,12.664 U1.AD8@18.47,12.65
DEBUG_UART_TX: P1.2 U1.AD10 | length 4
  Top Layer w0.2: P1.2@15.21,13.84 15.293,13.757 16.633,13.757 18.226,12.164 18.456,12.164 U1.AD10@18.47,12.15
EN: U1.A14 U9.1 | length 17.5
  Top Layer w0.2: U1.A14@24.97,11.15 26.311,11.15 26.361,11.1 28.2,11.1 28.85,11.75 28.85,12.286 v1(28.865,12.301) ; v1(28.55,15.35) 28.55,15.327 28.85,15.027 v1@28.85,12.3 ; v2(28.8,21.9) 28.8,21.968 29,22.168 U9.1@29,22.7
  Bottom Layer w0.2: v1(28.55,15.35) 28.1,15.8 27.75,15.8 26.5,17.05 26.5,18.849 28.48,20.829 28.683,20.829 28.8,20.946 v2(28.8,21.9)